# Altium PCB WorldClock.PcbDoc (part 3 of 13)
Units mil, origin at the board's own origin, x right, y up, seen from the top; angles counter-clockwise.
Board outline 3700 x 3850 mil, 2 copper layers (Top Layer, Bottom Layer); 227 components, 134 nets, 1324 pads, 248 vias.
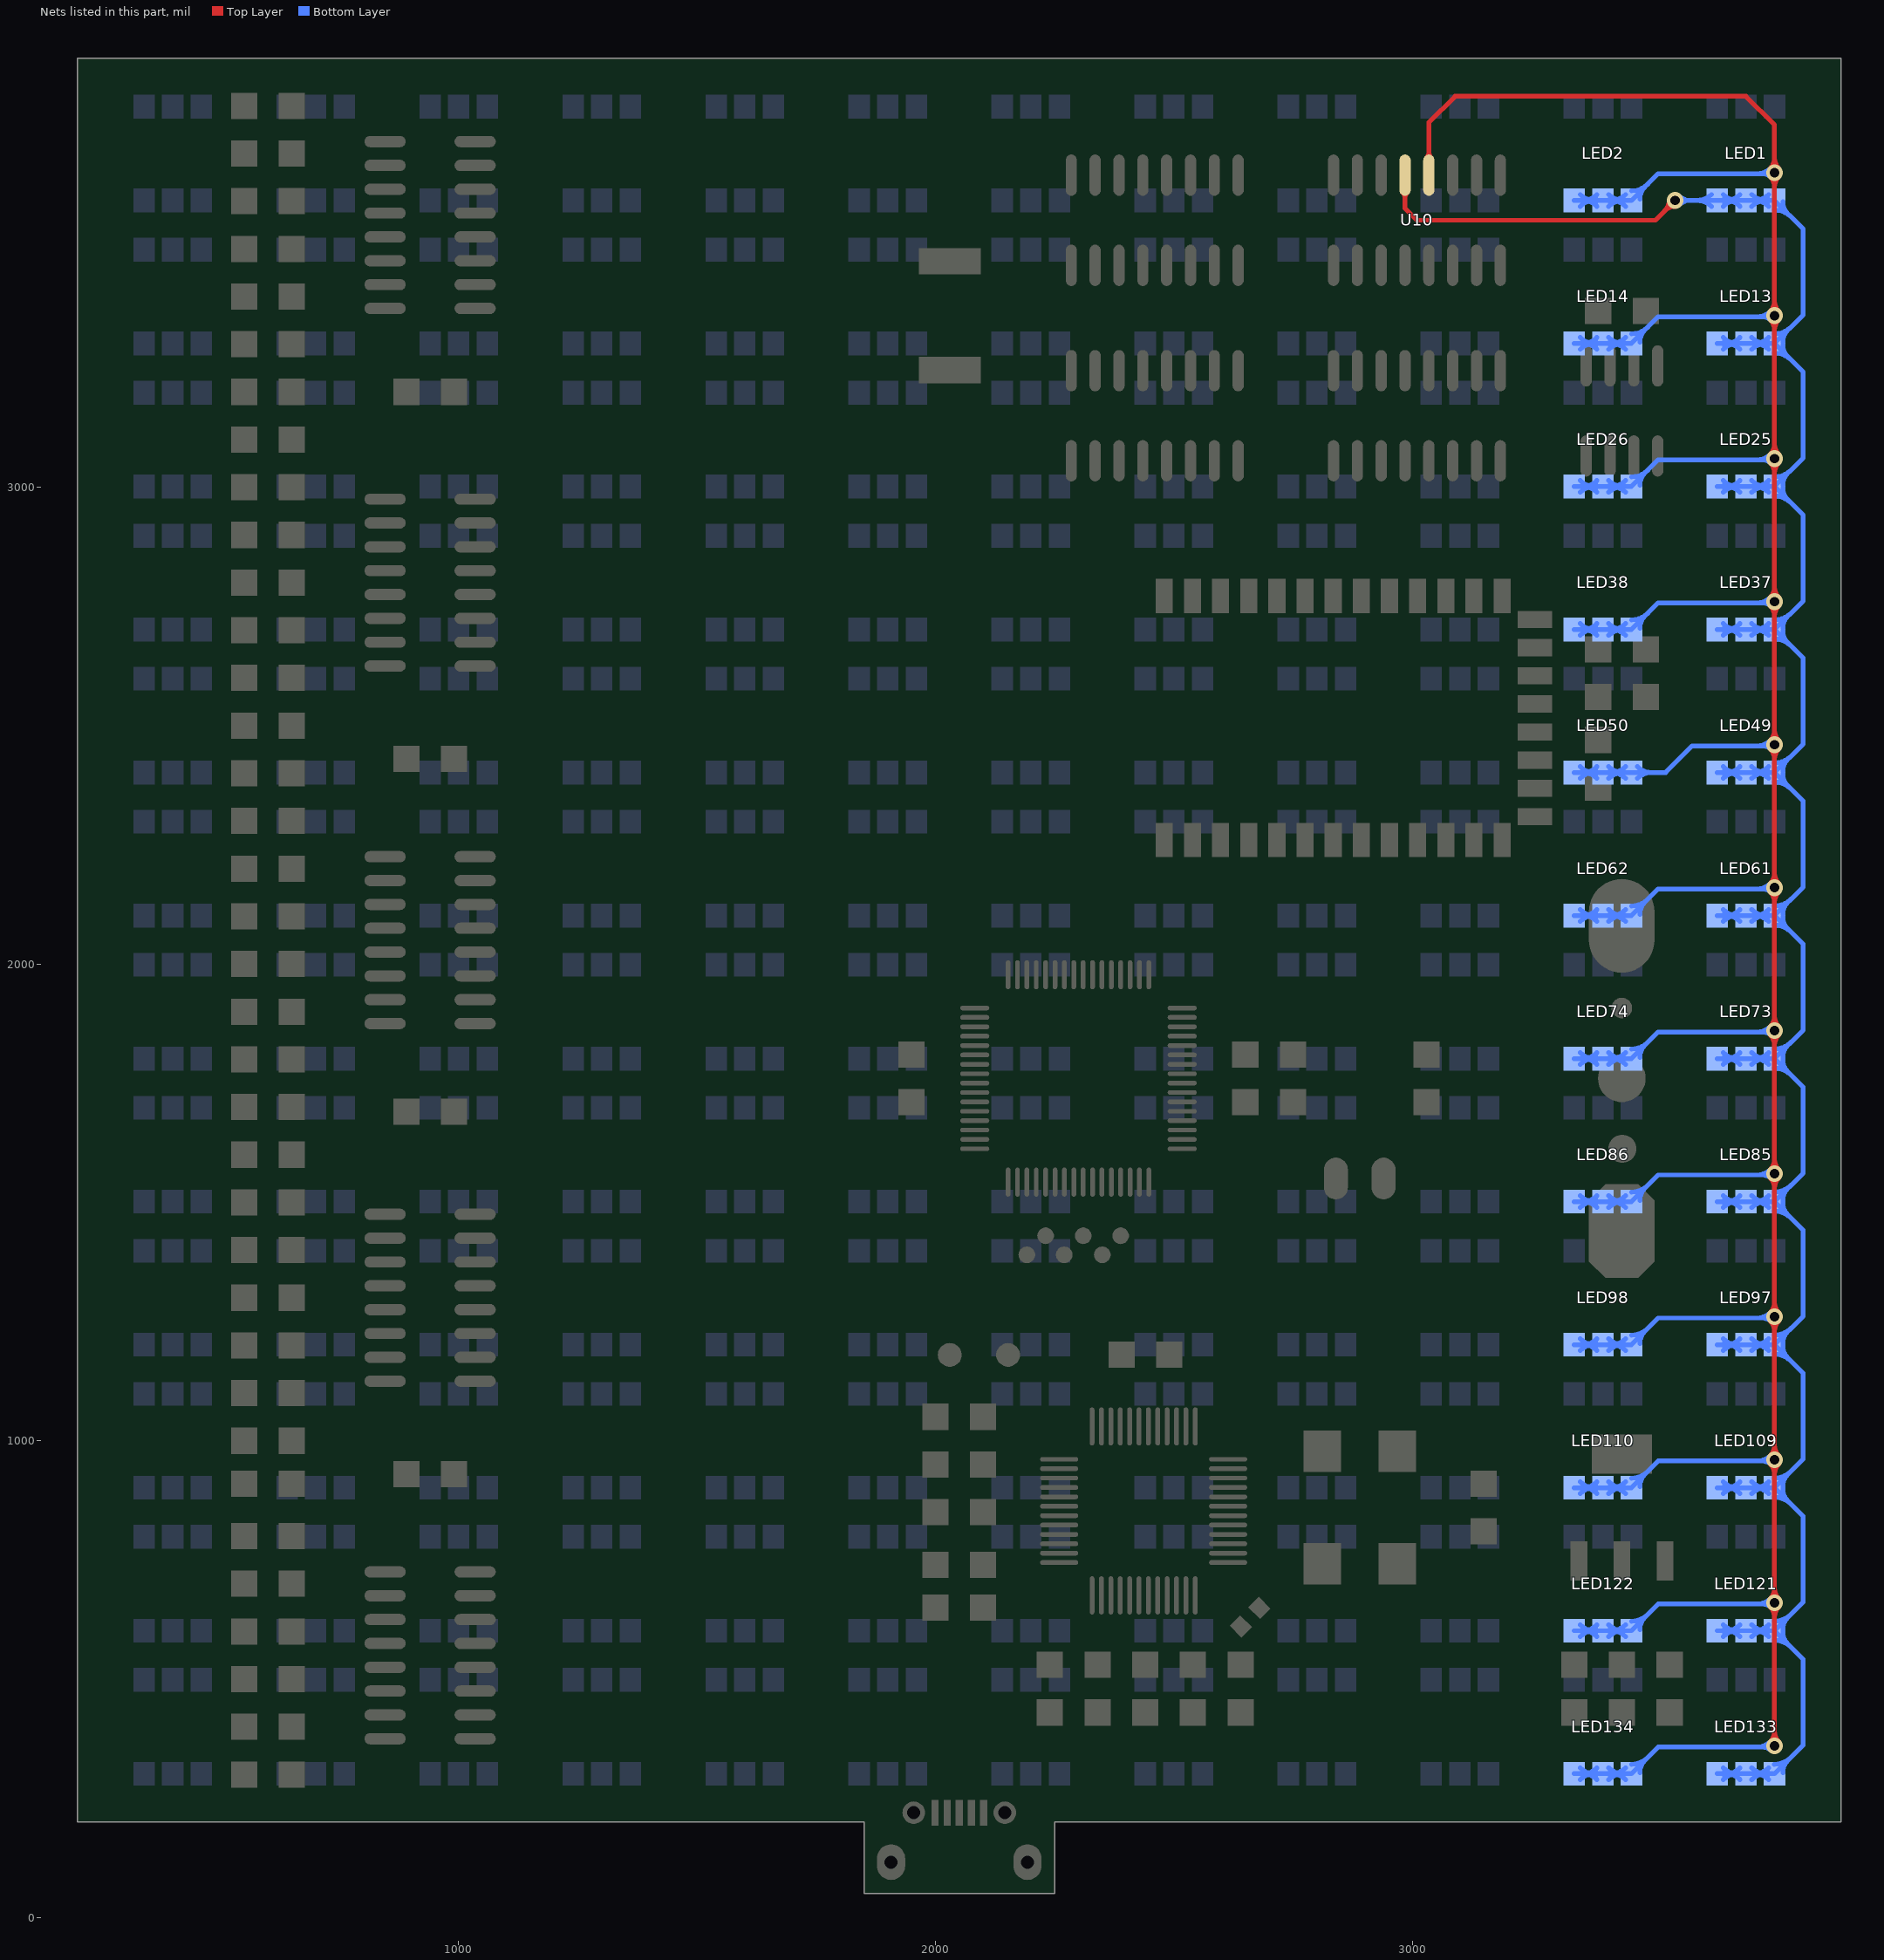
[diagram p3: the nets of this part, all layers, seen from the top]

## Via types
v1: diameter 35, hole 20, Top Layer to Bottom Layer, tented both sides, 213 vias
v2: diameter 24, hole 12, Top Layer to Bottom Layer, tented both sides, 35 vias

## Nets (pads, with @x,y where several pads share a name; then routed paths per layer and width w, separated by ;. In a path a pad name is that pad's centre, name@x,y a point inside that pad or via, vN(x,y) a via of type N, cw(c..) or ccw(c..) an arc to the next point about the centre after c; other vN are vias at no path point) (continued)
CH1: LED1.4 LED1.5 LED1.6 LED13.4 LED13.5 LED13.6 LED25.4 LED25.5 LED25.6 LED37.4 LED37.5 LED37.6 LED49.4 LED49.5 LED49.6 LED61.4 LED61.5 LED61.6 LED73.4 LED73.5 LED73.6 LED85.4 LED85.5 LED85.6 LED97.4 LED97.5 LED97.6 LED109.4 LED109.5 LED109.6 LED121.4 LED121.5 LED121.6 LED133.4 LED133.5 LED133.6 U10.13 | length 12195.9
  Top Layer w10: U10.13@2980.18,3618.18 cw(c2968.56,3606.55) 2985,3606.55 cw(c3001.44,3606.55) U10.13@2989.82,3618.18 ; U10.13@2985,3654.49 2985,3585 3010,3560 3510,3560 v1@3550,3600 ; v1@3539.07,3601.57 cw(c3508.9,3601.57) 3530.24,3580.24 cw(c3551.57,3558.9) v1@3551.57,3589.07
  Bottom Layer w10: v1@3550,3600 v1(3551.57,3601.57) LED1.6@3640,3601.57 LED1.5@3700,3601.57 LED1.4@3760,3601.57 3820,3541.57 3820,3361.57 LED13.4@3760,3301.57 ; v1@3560.41,3592.74 cw(c3581.75,3571.4) 3581.75,3601.57 cw(c3581.75,3631.75) v1@3560.41,3610.41 ; LED1.6@3627.63,3589.2 ccw(c3597.75,3559.33) 3597.75,3601.57 ccw(c3597.75,3643.82) LED1.6@3627.63,3613.95 ; LED133.6@3640,301.57 LED133.5@3700,301.57 LED133.4@3760,301.57 3820,361.57 3820,541.57 LED121.4@3760,601.57 ; LED121.6@3640,601.57 LED121.5@3700,601.57 LED121.4@3760,601.57 ; LED109.6@3640,901.57 LED109.5@3700,901.57 LED109.4@3760,901.57 ; LED97.6@3640,1201.57 LED97.5@3700,1201.57 LED97.4@3760,1201.57 ; LED85.6@3640,1501.57 LED85.5@3700,1501.57 LED85.4@3760,1501.57 ; LED73.6@3640,1801.57 LED73.5@3700,1801.57 LED73.4@3760,1801.57 ; LED61.6@3640,2101.57 LED61.5@3700,2101.57 LED61.4@3760,2101.57 ; LED49.6@3640,2401.57 LED49.5@3700,2401.57 LED49.4@3760,2401.57 ; LED37.6@3640,2701.57 LED37.5@3700,2701.57 LED37.4@3760,2701.57 ; LED25.6@3640,3001.57 LED25.5@3700,3001.57 LED25.4@3760,3001.57 ; LED13.6@3640,3301.57 LED13.5@3700,3301.57 LED13.4@3760,3301.57 ; LED133.6@3652.37,289.2 cw(c3682.25,259.33) 3682.25,301.57 cw(c3682.25,343.82) LED133.6@3652.37,313.95 ; LED121.6@3652.37,589.2 cw(c3682.25,559.33) 3682.25,601.57 cw(c3682.25,643.82) LED121.6@3652.37,613.95 ; LED109.6@3652.37,889.2 cw(c3682.25,859.33) 3682.25,901.57 cw(c3682.25,943.82) LED109.6@3652.37,913.95 ; LED97.6@3652.37,1189.2 cw(c3682.25,1159.33) 3682.25,1201.57 cw(c3682.25,1243.82) LED97.6@3652.37,1213.95 ; LED85.6@3652.37,1489.2 cw(c3682.25,1459.33) 3682.25,1501.57 cw(c3682.25,1543.82) LED85.6@3652.37,1513.95 ; LED73.6@3652.37,1789.2 cw(c3682.25,1759.33) 3682.25,1801.57 cw(c3682.25,1843.82) LED73.6@3652.37,1813.95 ; LED61.6@3652.37,2089.2 cw(c3682.25,2059.33) 3682.25,2101.57 cw(c3682.25,2143.82) LED61.6@3652.37,2113.95 ; LED49.6@3652.37,2389.2 cw(c3682.25,2359.33) 3682.25,2401.57 cw(c3682.25,2443.82) LED49.6@3652.37,2413.95 ; LED37.6@3652.37,2689.2 cw(c3682.25,2659.33) 3682.25,2701.57 cw(c3682.25,2743.82) LED37.6@3652.37,2713.95 ; LED25.6@3652.37,2989.2 cw(c3682.25,2959.33) 3682.25,3001.57 cw(c3682.25,3043.82) LED25.6@3652.37,3013.95 ; LED13.6@3652.37,3289.2 cw(c3682.25,3259.33) 3682.25,3301.57 cw(c3682.25,3343.82) LED13.6@3652.37,3313.95 ; LED1.6@3652.37,3589.2 cw(c3682.25,3559.33) 3682.25,3601.57 cw(c3682.25,3643.82) LED1.6@3652.37,3613.95 ; LED133.6@3655.16,295.32 cw(c3671.02,286.17) 3666.28,303.86 ; LED133.6@3655.16,307.82 ccw(c3671.02,316.98) 3666.28,299.29 ; LED121.6@3655.16,595.32 cw(c3671.02,586.17) 3666.28,603.86 ; LED121.6@3655.16,607.82 ccw(c3671.02,616.98) 3666.28,599.29 ; LED109.6@3655.16,895.32 cw(c3671.02,886.17) 3666.28,903.86 ; LED109.6@3655.16,907.82 ccw(c3671.02,916.98) 3666.28,899.29 ; LED97.6@3655.16,1195.32 cw(c3671.02,1186.17) 3666.28,1203.86 ; LED97.6@3655.16,1207.82 ccw(c3671.02,1216.98) 3666.28,1199.29 ; LED85.6@3655.16,1495.32 cw(c3671.02,1486.17) 3666.28,1503.86 ; LED85.6@3655.16,1507.82 ccw(c3671.02,1516.98) 3666.28,1499.29 ; LED73.6@3655.16,1795.32 cw(c3671.02,1786.17) 3666.28,1803.86 ; LED73.6@3655.16,1807.82 ccw(c3671.02,1816.98) 3666.28,1799.29 ; LED61.6@3655.16,2095.32 cw(c3671.02,2086.17) 3666.28,2103.86 ; LED61.6@3655.16,2107.82 ccw(c3671.02,2116.98) 3666.28,2099.29 ; LED49.6@3655.16,2395.32 cw(c3671.02,2386.17) 3666.28,2403.86 ; LED49.6@3655.16,2407.82 ccw(c3671.02,2416.98) 3666.28,2399.29 ; LED37.6@3655.16,2695.32 cw(c3671.02,2686.17) 3666.28,2703.86 ; LED37.6@3655.16,2707.82 ccw(c3671.02,2716.98) 3666.28,2699.29 ; LED25.6@3655.16,2995.32 cw(c3671.02,2986.17) 3666.28,3003.86 ; LED25.6@3655.16,3007.82 ccw(c3671.02,3016.98) 3666.28,2999.29 ; LED13.6@3655.16,3295.32 cw(c3671.02,3286.17) 3666.28,3303.86 ; LED13.6@3655.16,3307.82 ccw(c3671.02,3316.98) 3666.28,3299.29 ; LED1.6@3655.16,3595.32 cw(c3671.02,3586.17) 3666.28,3603.86 ; LED1.6@3655.16,3607.82 ccw(c3671.02,3616.98) 3666.28,3599.29 ; LED133.6@3656.56,293.41 cw(c3664.87,290.57) 3667.15,299.06 ; LED133.6@3656.56,309.74 ccw(c3664.87,312.58) 3667.15,304.09 ; LED121.6@3656.56,593.41 cw(c3664.87,590.57) 3667.15,599.06 ; LED121.6@3656.56,609.74 ccw(c3664.87,612.58) 3667.15,604.09 ; LED109.6@3656.56,893.41 cw(c3664.87,890.57) 3667.15,899.06 ; LED109.6@3656.56,909.74 ccw(c3664.87,912.58) 3667.15,904.09 ; LED97.6@3656.56,1193.41 cw(c3664.87,1190.57) 3667.15,1199.06 ; LED97.6@3656.56,1209.74 ccw(c3664.87,1212.58) 3667.15,1204.09 ; LED85.6@3656.56,1493.41 cw(c3664.87,1490.57) 3667.15,1499.06 ; LED85.6@3656.56,1509.74 ccw(c3664.87,1512.58) 3667.15,1504.09 ; LED73.6@3656.56,1793.41 cw(c3664.87,1790.57) 3667.15,1799.06 ; LED73.6@3656.56,1809.74 ccw(c3664.87,1812.58) 3667.15,1804.09 ; LED61.6@3656.56,2093.41 cw(c3664.87,2090.57) 3667.15,2099.06 ; LED61.6@3656.56,2109.74 ccw(c3664.87,2112.58) 3667.15,2104.09 ; LED49.6@3656.56,2393.41 cw(c3664.87,2390.57) 3667.15,2399.06 ; LED49.6@3656.56,2409.74 ccw(c3664.87,2412.58) 3667.15,2404.09 ; LED37.6@3656.56,2693.41 cw(c3664.87,2690.57) 3667.15,2699.06 ; LED37.6@3656.56,2709.74 ccw(c3664.87,2712.58) 3667.15,2704.09 ; LED25.6@3656.56,2993.41 cw(c3664.87,2990.57) 3667.15,2999.06 ; LED25.6@3656.56,3009.74 ccw(c3664.87,3012.58) 3667.15,3004.09 ; LED13.6@3656.56,3293.41 cw(c3664.87,3290.57) 3667.15,3299.06 ; LED13.6@3656.56,3309.74 ccw(c3664.87,3312.58) 3667.15,3304.09 ; LED1.6@3656.56,3593.41 cw(c3664.87,3590.57) 3667.15,3599.06 ; LED1.6@3656.56,3609.74 ccw(c3664.87,3612.58) 3667.15,3604.09 ; LED133.5@3687.63,289.2 ccw(c3657.75,259.33) 3657.75,301.57 ccw(c3657.75,343.82) LED133.5@3687.63,313.95 ; LED121.5@3687.63,589.2 ccw(c3657.75,559.33) 3657.75,601.57 ccw(c3657.75,643.82) LED121.5@3687.63,613.95 ; LED109.5@3687.63,889.2 ccw(c3657.75,859.33) 3657.75,901.57 ccw(c3657.75,943.82) LED109.5@3687.63,913.95 ; LED97.5@3687.63,1189.2 ccw(c3657.75,1159.33) 3657.75,1201.57 ccw(c3657.75,1243.82) LED97.5@3687.63,1213.95 ; LED85.5@3687.63,1489.2 ccw(c3657.75,1459.33) 3657.75,1501.57 ccw(c3657.75,1543.82) LED85.5@3687.63,1513.95 ; LED73.5@3687.63,1789.2 ccw(c3657.75,1759.33) 3657.75,1801.57 ccw(c3657.75,1843.82) LED73.5@3687.63,1813.95 ; LED61.5@3687.63,2089.2 ccw(c3657.75,2059.33) 3657.75,2101.57 ccw(c3657.75,2143.82) LED61.5@3687.63,2113.95 ; LED49.5@3687.63,2389.2 ccw(c3657.75,2359.33) 3657.75,2401.57 ccw(c3657.75,2443.82) LED49.5@3687.63,2413.95 ; LED37.5@3687.63,2689.2 ccw(c3657.75,2659.33) 3657.75,2701.57 ccw(c3657.75,2743.82) LED37.5@3687.63,2713.95 ; LED25.5@3687.63,2989.2 ccw(c3657.75,2959.33) 3657.75,3001.57 ccw(c3657.75,3043.82) LED25.5@3687.63,3013.95 ; LED13.5@3687.63,3289.2 ccw(c3657.75,3259.33) 3657.75,3301.57 ccw(c3657.75,3343.82) LED13.5@3687.63,3313.95 ; LED1.5@3687.63,3589.2 ccw(c3657.75,3559.33) 3657.75,3601.57 ccw(c3657.75,3643.82) LED1.5@3687.63,3613.95 ; LED133.5@3712.37,289.2 cw(c3742.25,259.33) 3742.25,301.57 cw(c3742.25,343.82) LED133.5@3712.37,313.95 ; LED121.5@3712.37,589.2 cw(c3742.25,559.33) 3742.25,601.57 cw(c3742.25,643.82) LED121.5@3712.37,613.95 ; LED109.5@3712.37,889.2 cw(c3742.25,859.33) 3742.25,901.57 cw(c3742.25,943.82) LED109.5@3712.37,913.95 ; LED97.5@3712.37,1189.2 cw(c3742.25,1159.33) 3742.25,1201.57 cw(c3742.25,1243.82) LED97.5@3712.37,1213.95 ; LED85.5@3712.37,1489.2 cw(c3742.25,1459.33) 3742.25,1501.57 cw(c3742.25,1543.82) LED85.5@3712.37,1513.95 ; LED73.5@3712.37,1789.2 cw(c3742.25,1759.33) 3742.25,1801.57 cw(c3742.25,1843.82) LED73.5@3712.37,1813.95 ; LED61.5@3712.37,2089.2 cw(c3742.25,2059.33) 3742.25,2101.57 cw(c3742.25,2143.82) LED61.5@3712.37,2113.95 ; LED49.5@3712.37,2389.2 cw(c3742.25,2359.33) 3742.25,2401.57 cw(c3742.25,2443.82) LED49.5@3712.37,2413.95 ; LED37.5@3712.37,2689.2 cw(c3742.25,2659.33) 3742.25,2701.57 cw(c3742.25,2743.82) LED37.5@3712.37,2713.95 ; LED25.5@3712.37,2989.2 cw(c3742.25,2959.33) 3742.25,3001.57 cw(c3742.25,3043.82) LED25.5@3712.37,3013.95 ; LED13.5@3712.37,3289.2 cw(c3742.25,3259.33) 3742.25,3301.57 cw(c3742.25,3343.82) LED13.5@3712.37,3313.95 ; LED1.5@3712.37,3589.2 cw(c3742.25,3559.33) 3742.25,3601.57 cw(c3742.25,3643.82) LED1.5@3712.37,3613.95 ; 3732.85,299.06 cw(c3735.13,290.57) LED133.4@3743.44,293.41 ; 3732.85,304.09 ccw(c3735.13,312.58) LED133.4@3743.44,309.74 ; 3732.85,599.06 cw(c3735.13,590.57) LED121.4@3743.44,593.41 ; 3732.85,604.09 ccw(c3735.13,612.58) LED121.4@3743.44,609.74 ; 3732.85,899.06 cw(c3735.13,890.57) LED109.4@3743.44,893.41 ; 3732.85,904.09 ccw(c3735.13,912.58) LED109.4@3743.44,909.74 ; 3732.85,1199.06 cw(c3735.13,1190.57) LED97.4@3743.44,1193.41 ; 3732.85,1204.09 ccw(c3735.13,1212.58) LED97.4@3743.44,1209.74 ; 3732.85,1499.06 cw(c3735.13,1490.57) LED85.4@3743.44,1493.41 ; 3732.85,1504.09 ccw(c3735.13,1512.58) LED85.4@3743.44,1509.74 ; 3732.85,1799.06 cw(c3735.13,1790.57) LED73.4@3743.44,1793.41 ; 3732.85,1804.09 ccw(c3735.13,1812.58) LED73.4@3743.44,1809.74 ; 3732.85,2099.06 cw(c3735.13,2090.57) LED61.4@3743.44,2093.41 ; 3732.85,2104.09 ccw(c3735.13,2112.58) LED61.4@3743.44,2109.74 ; 3732.85,2399.06 cw(c3735.13,2390.57) LED49.4@3743.44,2393.41 ; 3732.85,2404.09 ccw(c3735.13,2412.58) LED49.4@3743.44,2409.74 ; 3732.85,2699.06 cw(c3735.13,2690.57) LED37.4@3743.44,2693.41 ; 3732.85,2704.09 ccw(c3735.13,2712.58) LED37.4@3743.44,2709.74 ; 3732.85,2999.06 cw(c3735.13,2990.57) LED25.4@3743.44,2993.41 ; 3732.85,3004.09 ccw(c3735.13,3012.58) LED25.4@3743.44,3009.74 ; 3732.85,3299.06 cw(c3735.13,3290.57) LED13.4@3743.44,3293.41 ; 3732.85,3304.09 ccw(c3735.13,3312.58) LED13.4@3743.44,3309.74 ; 3732.85,3599.06 cw(c3735.13,3590.57) LED1.4@3743.44,3593.41 ; 3732.85,3604.09 ccw(c3735.13,3612.58) LED1.4@3743.44,3609.74 ; 3733.72,299.29 ccw(c3728.98,316.98) LED133.4@3744.84,307.82 ; 3733.72,303.86 cw(c3728.98,286.17) LED133.4@3744.84,295.32 ; 3733.72,599.29 ccw(c3728.98,616.98) LED121.4@3744.84,607.82 ; 3733.72,603.86 cw(c3728.98,586.17) LED121.4@3744.84,595.32 ; 3733.72,899.29 ccw(c3728.98,916.98) LED109.4@3744.84,907.82 ; 3733.72,903.86 cw(c3728.98,886.17) LED109.4@3744.84,895.32 ; 3733.72,1199.29 ccw(c3728.98,1216.98) LED97.4@3744.84,1207.82 ; 3733.72,1203.86 cw(c3728.98,1186.17) LED97.4@3744.84,1195.32 ; 3733.72,1499.29 ccw(c3728.98,1516.98) LED85.4@3744.84,1507.82 ; 3733.72,1503.86 cw(c3728.98,1486.17) LED85.4@3744.84,1495.32 ; 3733.72,1799.29 ccw(c3728.98,1816.98) LED73.4@3744.84,1807.82 ; 3733.72,1803.86 cw(c3728.98,1786.17) LED73.4@3744.84,1795.32 ; 3733.72,2099.29 ccw(c3728.98,2116.98) LED61.4@3744.84,2107.82 ; 3733.72,2103.86 cw(c3728.98,2086.17) LED61.4@3744.84,2095.32 ; 3733.72,2399.29 ccw(c3728.98,2416.98) LED49.4@3744.84,2407.82 ; 3733.72,2403.86 cw(c3728.98,2386.17) LED49.4@3744.84,2395.32 ; 3733.72,2699.29 ccw(c3728.98,2716.98) LED37.4@3744.84,2707.82 ; 3733.72,2703.86 cw(c3728.98,2686.17) LED37.4@3744.84,2695.32 ; 3733.72,2999.29 ccw(c3728.98,3016.98) LED25.4@3744.84,3007.82 ; 3733.72,3003.86 cw(c3728.98,2986.17) LED25.4@3744.84,2995.32 ; 3733.72,3299.29 ccw(c3728.98,3316.98) LED13.4@3744.84,3307.82 ; 3733.72,3303.86 cw(c3728.98,3286.17) LED13.4@3744.84,3295.32 ; 3733.72,3599.29 ccw(c3728.98,3616.98) LED1.4@3744.84,3607.82 ; 3733.72,3603.86 cw(c3728.98,3586.17) LED1.4@3744.84,3595.32 ; LED133.4@3747.63,289.2 ccw(c3717.75,259.33) 3717.75,301.57 ccw(c3717.75,343.82) LED133.4@3747.63,313.95 ; LED121.4@3747.63,589.2 ccw(c3717.75,559.33) 3717.75,601.57 ccw(c3717.75,643.82) LED121.4@3747.63,613.95 ; LED109.4@3747.63,889.2 ccw(c3717.75,859.33) 3717.75,901.57 ccw(c3717.75,943.82) LED109.4@3747.63,913.95 ; LED97.4@3747.63,1189.2 ccw(c3717.75,1159.33) 3717.75,1201.57 ccw(c3717.75,1243.82) LED97.4@3747.63,1213.95 ; LED85.4@3747.63,1489.2 ccw(c3717.75,1459.33) 3717.75,1501.57 ccw(c3717.75,1543.82) LED85.4@3747.63,1513.95 ; LED73.4@3747.63,1789.2 ccw(c3717.75,1759.33) 3717.75,1801.57 ccw(c3717.75,1843.82) LED73.4@3747.63,1813.95 ; LED61.4@3747.63,2089.2 ccw(c3717.75,2059.33) 3717.75,2101.57 ccw(c3717.75,2143.82) LED61.4@3747.63,2113.95 ; LED49.4@3747.63,2389.2 ccw(c3717.75,2359.33) 3717.75,2401.57 ccw(c3717.75,2443.82) LED49.4@3747.63,2413.95 ; LED37.4@3747.63,2689.2 ccw(c3717.75,2659.33) 3717.75,2701.57 ccw(c3717.75,2743.82) LED37.4@3747.63,2713.95 ; LED25.4@3747.63,2989.2 ccw(c3717.75,2959.33) 3717.75,3001.57 ccw(c3717.75,3043.82) LED25.4@3747.63,3013.95 ; LED13.4@3747.63,3289.2 ccw(c3717.75,3259.33) 3717.75,3301.57 ccw(c3717.75,3343.82) LED13.4@3747.63,3313.95 ; LED1.4@3747.63,3589.2 ccw(c3717.75,3559.33) 3717.75,3601.57 ccw(c3717.75,3643.82) LED1.4@3747.63,3613.95 ; LED133.4@3760,321.57 ccw(c3760,369.86) 3794.14,335.72 ; LED121.4@3760,581.57 cw(c3760,533.29) 3794.14,567.43 ; LED121.4@3760,621.57 ccw(c3760,669.86) 3794.14,635.72 ; LED109.4@3760,881.57 cw(c3760,833.29) 3794.14,867.43 ; LED109.4@3760,921.57 ccw(c3760,969.86) 3794.14,935.72 ; LED97.4@3760,1181.57 cw(c3760,1133.29) 3794.14,1167.43 ; LED97.4@3760,1221.57 ccw(c3760,1269.86) 3794.14,1235.72 ; LED85.4@3760,1481.57 cw(c3760,1433.29) 3794.14,1467.43 ; LED85.4@3760,1521.57 ccw(c3760,1569.86) 3794.14,1535.72 ; LED73.4@3760,1781.57 cw(c3760,1733.29) 3794.14,1767.43 ; LED73.4@3760,1821.57 ccw(c3760,1869.86) 3794.14,1835.72 ; LED61.4@3760,2081.57 cw(c3760,2033.29) 3794.14,2067.43 ; LED61.4@3760,2121.57 ccw(c3760,2169.86) 3794.14,2135.72 ; LED49.4@3760,2381.57 cw(c3760,2333.29) 3794.14,2367.43 ; LED49.4@3760,2421.57 ccw(c3760,2469.86) 3794.14,2435.72 ; LED37.4@3760,2681.57 cw(c3760,2633.29) 3794.14,2667.43 ; LED37.4@3760,2721.57 ccw(c3760,2769.86) 3794.14,2735.72 ; LED25.4@3760,2981.57 cw(c3760,2933.29) 3794.14,2967.43 ; LED25.4@3760,3021.57 ccw(c3760,3069.86) 3794.14,3035.72 ; LED13.4@3760,3281.57 cw(c3760,3233.29) 3794.14,3267.43 ; LED13.4@3760,3321.57 ccw(c3760,3369.86) 3794.14,3335.72 ; LED1.4@3760,3581.57 cw(c3760,3533.29) 3794.14,3567.43 ; LED133.4@3777.5,304.07 cw(c3813.71,304.07) 3788.11,329.68 ; LED121.4@3777.5,599.07 ccw(c3813.71,599.07) 3788.11,573.47 ; LED121.4@3777.5,604.07 cw(c3813.71,604.07) 3788.11,629.68 ; LED109.4@3777.5,899.07 ccw(c3813.71,899.07) 3788.11,873.47 ; LED109.4@3777.5,904.07 cw(c3813.71,904.07) 3788.11,929.68 ; LED97.4@3777.5,1199.07 ccw(c3813.71,1199.07) 3788.11,1173.47 ; LED97.4@3777.5,1204.07 cw(c3813.71,1204.07) 3788.11,1229.68 ; LED85.4@3777.5,1499.07 ccw(c3813.71,1499.07) 3788.11,1473.47 ; LED85.4@3777.5,1504.07 cw(c3813.71,1504.07) 3788.11,1529.68 ; LED73.4@3777.5,1799.07 ccw(c3813.71,1799.07) 3788.11,1773.47 ; LED73.4@3777.5,1804.07 cw(c3813.71,1804.07) 3788.11,1829.68 ; LED61.4@3777.5,2099.07 ccw(c3813.71,2099.07) 3788.11,2073.47 ; LED61.4@3777.5,2104.07 cw(c3813.71,2104.07) 3788.11,2129.68 ; LED49.4@3777.5,2399.07 ccw(c3813.71,2399.07) 3788.11,2373.47 ; LED49.4@3777.5,2404.07 cw(c3813.71,2404.07) 3788.11,2429.68 ; LED37.4@3777.5,2699.07 ccw(c3813.71,2699.07) 3788.11,2673.47 ; LED37.4@3777.5,2704.07 cw(c3813.71,2704.07) 3788.11,2729.68 ; LED25.4@3777.5,2999.07 ccw(c3813.71,2999.07) 3788.11,2973.47 ; LED25.4@3777.5,3004.07 cw(c3813.71,3004.07) 3788.11,3029.68 ; LED13.4@3777.5,3299.07 ccw(c3813.71,3299.07) 3788.11,3273.47 ; LED13.4@3777.5,3304.07 cw(c3813.71,3304.07) 3788.11,3329.68 ; LED1.4@3777.5,3599.07 ccw(c3813.71,3599.07) 3788.11,3573.47 ; LED121.4@3760,601.57 3820,661.57 3820,841.57 LED109.4@3760,901.57 ; LED109.4@3760,901.57 3820,961.57 3820,1141.57 LED97.4@3760,1201.57 ; LED97.4@3760,1201.57 3820,1261.57 3820,1441.57 LED85.4@3760,1501.57 ; LED85.4@3760,1501.57 3820,1561.57 3820,1741.57 LED73.4@3760,1801.57 ; LED73.4@3760,1801.57 3820,1861.57 3820,2041.57 LED61.4@3760,2101.57 ; LED61.4@3760,2101.57 3820,2161.57 3820,2341.57 LED49.4@3760,2401.57 ; LED49.4@3760,2401.57 3820,2461.57 3820,2641.57 LED37.4@3760,2701.57 ; LED37.4@3760,2701.57 3820,2761.57 3820,2941.57 LED25.4@3760,3001.57 ; LED25.4@3760,3001.57 3820,3061.57 3820,3241.57 LED13.4@3760,3301.57
CH2: LED2.4 LED2.5 LED2.6 LED14.4 LED14.5 LED14.6 LED26.4 LED26.5 LED26.6 LED38.4 LED38.5 LED38.6 LED50.4 LED50.5 LED50.6 LED62.4 LED62.5 LED62.6 LED74.4 LED74.5 LED74.6 LED86.4 LED86.5 LED86.6 LED98.4 LED98.5 LED98.6 LED110.4 LED110.5 LED110.6 LED122.4 LED122.5 LED122.6 LED134.4 LED134.5 LED134.6 U10.12 | length 16604.9
  Top Layer w10: U10.12@3030.18,3690.8 ccw(c3018.56,3702.43) 3035,3702.43 ccw(c3051.44,3702.43) U10.12@3039.82,3690.8 ; U10.12@3035,3654.49 3035,3765 3090,3820 3700,3820 3760,3760 v1(3760,3660) v1(3760,3360) v1(3760,3060) v1(3760,2760) v1(3760,2460) v1(3760,2160) v1(3760,1860) v1(3760,1560) v1(3760,1260) v1(3760,960) v1(3760,660) v1(3760,360) ; v1@3751.16,368.84 ccw(c3729.82,390.18) 3760,390.18 ccw(c3790.18,390.18) v1@3768.84,368.84 ; v1@3751.16,651.16 cw(c3729.82,629.82) 3760,629.82 cw(c3790.18,629.82) v1@3768.84,651.16 ; v1@3751.16,668.84 ccw(c3729.82,690.18) 3760,690.18 ccw(c3790.18,690.18) v1@3768.84,668.84 ; v1@3751.16,951.16 cw(c3729.82,929.82) 3760,929.82 cw(c3790.18,929.82) v1@3768.84,951.16 ; v1@3751.16,968.84 ccw(c3729.82,990.18) 3760,990.18 ccw(c3790.18,990.18) v1@3768.84,968.84 ; v1@3751.16,1251.16 cw(c3729.82,1229.82) 3760,1229.82 cw(c3790.18,1229.82) v1@3768.84,1251.16 ; v1@3751.16,1268.84 ccw(c3729.82,1290.18) 3760,1290.18 ccw(c3790.18,1290.18) v1@3768.84,1268.84 ; v1@3751.16,1551.16 cw(c3729.82,1529.82) 3760,1529.82 cw(c3790.18,1529.82) v1@3768.84,1551.16 ; v1@3751.16,1568.84 ccw(c3729.82,1590.18) 3760,1590.18 ccw(c3790.18,1590.18) v1@3768.84,1568.84 ; v1@3751.16,1851.16 cw(c3729.82,1829.82) 3760,1829.82 cw(c3790.18,1829.82) v1@3768.84,1851.16 ; v1@3751.16,1868.84 ccw(c3729.82,1890.18) 3760,1890.18 ccw(c3790.18,1890.18) v1@3768.84,1868.84 ; v1@3751.16,2151.16 cw(c3729.82,2129.82) 3760,2129.82 cw(c3790.18,2129.82) v1@3768.84,2151.16 ; v1@3751.16,2168.84 ccw(c3729.82,2190.18) 3760,2190.18 ccw(c3790.18,2190.18) v1@3768.84,2168.84 ; v1@3751.16,2451.16 cw(c3729.82,2429.82) 3760,2429.82 cw(c3790.18,2429.82) v1@3768.84,2451.16 ; v1@3751.16,2468.84 ccw(c3729.82,2490.18) 3760,2490.18 ccw(c3790.18,2490.18) v1@3768.84,2468.84 ; v1@3751.16,2751.16 cw(c3729.82,2729.82) 3760,2729.82 cw(c3790.18,2729.82) v1@3768.84,2751.16 ; v1@3751.16,2768.84 ccw(c3729.82,2790.18) 3760,2790.18 ccw(c3790.18,2790.18) v1@3768.84,2768.84 ; v1@3751.16,3051.16 cw(c3729.82,3029.82) 3760,3029.82 cw(c3790.18,3029.82) v1@3768.84,3051.16 ; v1@3751.16,3068.84 ccw(c3729.82,3090.18) 3760,3090.18 ccw(c3790.18,3090.18) v1@3768.84,3068.84 ; v1@3751.16,3351.16 cw(c3729.82,3329.82) 3760,3329.82 cw(c3790.18,3329.82) v1@3768.84,3351.16 ; v1@3751.16,3368.84 ccw(c3729.82,3390.18) 3760,3390.18 ccw(c3790.18,3390.18) v1@3768.84,3368.84 ; v1@3751.16,3651.16 cw(c3729.82,3629.82) 3760,3629.82 cw(c3790.18,3629.82) v1@3768.84,3651.16 ; v1@3751.16,3668.84 ccw(c3729.82,3690.18) 3760,3690.18 ccw(c3790.18,3690.18) v1@3768.84,3668.84
  Bottom Layer w10: LED134.6@3340,301.57 LED134.5@3400,301.57 LED134.4@3460,301.57 3515.93,357.5 3757.5,357.5 v1(3760,360) ; LED122.6@3340,601.57 LED122.5@3400,601.57 LED122.4@3460,601.57 3515.93,657.5 3757.5,657.5 v1(3760,660) ; LED110.6@3340,901.57 LED110.5@3400,901.57 LED110.4@3460,901.57 3515.93,957.5 3757.5,957.5 v1(3760,960) ; LED98.6@3340,1201.57 LED98.5@3400,1201.57 LED98.4@3460,1201.57 3515.93,1257.5 3757.5,1257.5 v1(3760,1260) ; LED86.6@3340,1501.57 LED86.5@3400,1501.57 LED86.4@3460,1501.57 3515.93,1557.5 3757.5,1557.5 v1(3760,1560) ; LED74.6@3340,1801.57 LED74.5@3400,1801.57 LED74.4@3460,1801.57 3515.93,1857.5 3757.5,1857.5 v1(3760,1860) ; LED62.6@3340,2101.57 LED62.5@3400,2101.57 LED62.4@3460,2101.57 3515.93,2157.5 3757.5,2157.5 v1(3760,2160) ; LED50.6@3340,2401.57 LED50.5@3400,2401.57 LED50.4@3460,2401.57 3531.57,2401.57 3587.5,2457.5 3757.5,2457.5 v1(3760,2460) ; LED38.6@3340,2701.57 LED38.5@3400,2701.57 LED38.4@3460,2701.57 3515.93,2757.5 3757.5,2757.5 v1(3760,2760) ; LED26.6@3340,3001.57 LED26.5@3400,3001.57 LED26.4@3460,3001.57 3515.93,3057.5 3757.5,3057.5 v1(3760,3060) ; LED14.6@3340,3301.57 LED14.5@3400,3301.57 LED14.4@3460,3301.57 3515.93,3357.5 3757.5,3357.5 v1(3760,3360) ; LED2.6@3340,3601.57 LED2.5@3400,3601.57 LED2.4@3460,3601.57 3515.93,3657.5 3757.5,3657.5 v1(3760,3660) ; LED134.6@3352.37,289.2 cw(c3382.25,259.33) 3382.25,301.57 cw(c3382.25,343.82) LED134.6@3352.37,313.95 ; LED122.6@3352.37,589.2 cw(c3382.25,559.33) 3382.25,601.57 cw(c3382.25,643.82) LED122.6@3352.37,613.95 ; LED110.6@3352.37,889.2 cw(c3382.25,859.33) 3382.25,901.57 cw(c3382.25,943.82) LED110.6@3352.37,913.95 ; LED98.6@3352.37,1189.2 cw(c3382.25,1159.33) 3382.25,1201.57 cw(c3382.25,1243.82) LED98.6@3352.37,1213.95 ; LED86.6@3352.37,1489.2 cw(c3382.25,1459.33) 3382.25,1501.57 cw(c3382.25,1543.82) LED86.6@3352.37,1513.95 ; LED74.6@3352.37,1789.2 cw(c3382.25,1759.33) 3382.25,1801.57 cw(c3382.25,1843.82) LED74.6@3352.37,1813.95 ; LED62.6@3352.37,2089.2 cw(c3382.25,2059.33) 3382.25,2101.57 cw(c3382.25,2143.82) LED62.6@3352.37,2113.95 ; LED50.6@3352.37,2389.2 cw(c3382.25,2359.33) 3382.25,2401.57 cw(c3382.25,2443.82) LED50.6@3352.37,2413.95 ; LED38.6@3352.37,2689.2 cw(c3382.25,2659.33) 3382.25,2701.57 cw(c3382.25,2743.82) LED38.6@3352.37,2713.95 ; LED26.6@3352.37,2989.2 cw(c3382.25,2959.33) 3382.25,3001.57 cw(c3382.25,3043.82) LED26.6@3352.37,3013.95 ; LED14.6@3352.37,3289.2 cw(c3382.25,3259.33) 3382.25,3301.57 cw(c3382.25,3343.82) LED14.6@3352.37,3313.95 ; LED2.6@3352.37,3589.2 cw(c3382.25,3559.33) 3382.25,3601.57 cw(c3382.25,3643.82) LED2.6@3352.37,3613.95 ; 3372.85,299.06 cw(c3375.13,290.57) LED134.5@3383.44,293.41 ; 3372.85,304.09 ccw(c3375.13,312.58) LED134.5@3383.44,309.74 ; 3372.85,599.06 cw(c3375.13,590.57) LED122.5@3383.44,593.41 ; 3372.85,604.09 ccw(c3375.13,612.58) LED122.5@3383.44,609.74 ; 3372.85,899.06 cw(c3375.13,890.57) LED110.5@3383.44,893.41 ; 3372.85,904.09 ccw(c3375.13,912.58) LED110.5@3383.44,909.74 ; 3372.85,1199.06 cw(c3375.13,1190.57) LED98.5@3383.44,1193.41 ; 3372.85,1204.09 ccw(c3375.13,1212.58) LED98.5@3383.44,1209.74 ; 3372.85,1499.06 cw(c3375.13,1490.57) LED86.5@3383.44,1493.41 ; 3372.85,1504.09 ccw(c3375.13,1512.58) LED86.5@3383.44,1509.74 ; 3372.85,1799.06 cw(c3375.13,1790.57) LED74.5@3383.44,1793.41 ; 3372.85,1804.09 ccw(c3375.13,1812.58) LED74.5@3383.44,1809.74 ; 3372.85,2099.06 cw(c3375.13,2090.57) LED62.5@3383.44,2093.41 ; 3372.85,2104.09 ccw(c3375.13,2112.58) LED62.5@3383.44,2109.74 ; 3372.85,2399.06 cw(c3375.13,2390.57) LED50.5@3383.44,2393.41 ; 3372.85,2404.09 ccw(c3375.13,2412.58) LED50.5@3383.44,2409.74 ; 3372.85,2699.06 cw(c3375.13,2690.57) LED38.5@3383.44,2693.41 ; 3372.85,2704.09 ccw(c3375.13,2712.58) LED38.5@3383.44,2709.74 ; 3372.85,2999.06 cw(c3375.13,2990.57) LED26.5@3383.44,2993.41 ; 3372.85,3004.09 ccw(c3375.13,3012.58) LED26.5@3383.44,3009.74 ; 3372.85,3299.06 cw(c3375.13,3290.57) LED14.5@3383.44,3293.41 ; 3372.85,3304.09 ccw(c3375.13,3312.58) LED14.5@3383.44,3309.74 ; 3372.85,3599.06 cw(c3375.13,3590.57) LED2.5@3383.44,3593.41 ; 3372.85,3604.09 ccw(c3375.13,3612.58) LED2.5@3383.44,3609.74 ; 3373.72,299.29 ccw(c3368.98,316.98) LED134.5@3384.84,307.82 ; 3373.72,303.86 cw(c3368.98,286.17) LED134.5@3384.84,295.32 ; 3373.72,599.29 ccw(c3368.98,616.98) LED122.5@3384.84,607.82 ; 3373.72,603.86 cw(c3368.98,586.17) LED122.5@3384.84,595.32 ; 3373.72,899.29 ccw(c3368.98,916.98) LED110.5@3384.84,907.82 ; 3373.72,903.86 cw(c3368.98,886.17) LED110.5@3384.84,895.32 ; 3373.72,1199.29 ccw(c3368.98,1216.98) LED98.5@3384.84,1207.82 ; 3373.72,1203.86 cw(c3368.98,1186.17) LED98.5@3384.84,1195.32 ; 3373.72,1499.29 ccw(c3368.98,1516.98) LED86.5@3384.84,1507.82 ; 3373.72,1503.86 cw(c3368.98,1486.17) LED86.5@3384.84,1495.32 ; 3373.72,1799.29 ccw(c3368.98,1816.98) LED74.5@3384.84,1807.82 ; 3373.72,1803.86 cw(c3368.98,1786.17) LED74.5@3384.84,1795.32 ; 3373.72,2099.29 ccw(c3368.98,2116.98) LED62.5@3384.84,2107.82 ; 3373.72,2103.86 cw(c3368.98,2086.17) LED62.5@3384.84,2095.32 ; 3373.72,2399.29 ccw(c3368.98,2416.98) LED50.5@3384.84,2407.82 ; 3373.72,2403.86 cw(c3368.98,2386.17) LED50.5@3384.84,2395.32 ; 3373.72,2699.29 ccw(c3368.98,2716.98) LED38.5@3384.84,2707.82 ; 3373.72,2703.86 cw(c3368.98,2686.17) LED38.5@3384.84,2695.32 ; 3373.72,2999.29 ccw(c3368.98,3016.98) LED26.5@3384.84,3007.82 ; 3373.72,3003.86 cw(c3368.98,2986.17) LED26.5@3384.84,2995.32 ; 3373.72,3299.29 ccw(c3368.98,3316.98) LED14.5@3384.84,3307.82 ; 3373.72,3303.86 cw(c3368.98,3286.17) LED14.5@3384.84,3295.32 ; 3373.72,3599.29 ccw(c3368.98,3616.98) LED2.5@3384.84,3607.82 ; 3373.72,3603.86 cw(c3368.98,3586.17) LED2.5@3384.84,3595.32 ; LED134.5@3387.63,289.2 ccw(c3357.75,259.33) 3357.75,301.57 ccw(c3357.75,343.82) LED134.5@3387.63,313.95 ; LED122.5@3387.63,589.2 ccw(c3357.75,559.33) 3357.75,601.57 ccw(c3357.75,643.82) LED122.5@3387.63,613.95 ; LED110.5@3387.63,889.2 ccw(c3357.75,859.33) 3357.75,901.57 ccw(c3357.75,943.82) LED110.5@3387.63,913.95 ; LED98.5@3387.63,1189.2 ccw(c3357.75,1159.33) 3357.75,1201.57 ccw(c3357.75,1243.82) LED98.5@3387.63,1213.95 ; LED86.5@3387.63,1489.2 ccw(c3357.75,1459.33) 3357.75,1501.57 ccw(c3357.75,1543.82) LED86.5@3387.63,1513.95 ; LED74.5@3387.63,1789.2 ccw(c3357.75,1759.33) 3357.75,1801.57 ccw(c3357.75,1843.82) LED74.5@3387.63,1813.95 ; LED62.5@3387.63,2089.2 ccw(c3357.75,2059.33) 3357.75,2101.57 ccw(c3357.75,2143.82) LED62.5@3387.63,2113.95 ; LED50.5@3387.63,2389.2 ccw(c3357.75,2359.33) 3357.75,2401.57 ccw(c3357.75,2443.82) LED50.5@3387.63,2413.95 ; LED38.5@3387.63,2689.2 ccw(c3357.75,2659.33) 3357.75,2701.57 ccw(c3357.75,2743.82) LED38.5@3387.63,2713.95 ; LED26.5@3387.63,2989.2 ccw(c3357.75,2959.33) 3357.75,3001.57 ccw(c3357.75,3043.82) LED26.5@3387.63,3013.95 ; LED14.5@3387.63,3289.2 ccw(c3357.75,3259.33) 3357.75,3301.57 ccw(c3357.75,3343.82) LED14.5@3387.63,3313.95 ; LED2.5@3387.63,3589.2 ccw(c3357.75,3559.33) 3357.75,3601.57 ccw(c3357.75,3643.82) LED2.5@3387.63,3613.95 ; LED134.5@3412.37,289.2 cw(c3442.25,259.33) 3442.25,301.57 cw(c3442.25,343.82) LED134.5@3412.37,313.95 ; LED122.5@3412.37,589.2 cw(c3442.25,559.33) 3442.25,601.57 cw(c3442.25,643.82) LED122.5@3412.37,613.95 ; LED110.5@3412.37,889.2 cw(c3442.25,859.33) 3442.25,901.57 cw(c3442.25,943.82) LED110.5@3412.37,913.95 ; LED98.5@3412.37,1189.2 cw(c3442.25,1159.33) 3442.25,1201.57 cw(c3442.25,1243.82) LED98.5@3412.37,1213.95 ; LED86.5@3412.37,1489.2 cw(c3442.25,1459.33) 3442.25,1501.57 cw(c3442.25,1543.82) LED86.5@3412.37,1513.95 ; LED74.5@3412.37,1789.2 cw(c3442.25,1759.33) 3442.25,1801.57 cw(c3442.25,1843.82) LED74.5@3412.37,1813.95 ; LED62.5@3412.37,2089.2 cw(c3442.25,2059.33) 3442.25,2101.57 cw(c3442.25,2143.82) LED62.5@3412.37,2113.95 ; LED50.5@3412.37,2389.2 cw(c3442.25,2359.33) 3442.25,2401.57 cw(c3442.25,2443.82) LED50.5@3412.37,2413.95 ; LED38.5@3412.37,2689.2 cw(c3442.25,2659.33) 3442.25,2701.57 cw(c3442.25,2743.82) LED38.5@3412.37,2713.95 ; LED26.5@3412.37,2989.2 cw(c3442.25,2959.33) 3442.25,3001.57 cw(c3442.25,3043.82) LED26.5@3412.37,3013.95 ; LED14.5@3412.37,3289.2 cw(c3442.25,3259.33) 3442.25,3301.57 cw(c3442.25,3343.82) LED14.5@3412.37,3313.95 ; LED2.5@3412.37,3589.2 cw(c3442.25,3559.33) 3442.25,3601.57 cw(c3442.25,3643.82) LED2.5@3412.37,3613.95 ; LED134.5@3415.16,295.32 cw(c3431.02,286.17) 3426.28,303.86 ; LED134.5@3415.16,307.82 ccw(c3431.02,316.98) 3426.28,299.29 ; LED122.5@3415.16,595.32 cw(c3431.02,586.17) 3426.28,603.86 ; LED122.5@3415.16,607.82 ccw(c3431.02,616.98) 3426.28,599.29 ; LED110.5@3415.16,895.32 cw(c3431.02,886.17) 3426.28,903.86 ; LED110.5@3415.16,907.82 ccw(c3431.02,916.98) 3426.28,899.29 ; LED98.5@3415.16,1195.32 cw(c3431.02,1186.17) 3426.28,1203.86 ; LED98.5@3415.16,1207.82 ccw(c3431.02,1216.98) 3426.28,1199.29 ; LED86.5@3415.16,1495.32 cw(c3431.02,1486.17) 3426.28,1503.86 ; LED86.5@3415.16,1507.82 ccw(c3431.02,1516.98) 3426.28,1499.29 ; LED74.5@3415.16,1795.32 cw(c3431.02,1786.17) 3426.28,1803.86 ; LED74.5@3415.16,1807.82 ccw(c3431.02,1816.98) 3426.28,1799.29 ; LED62.5@3415.16,2095.32 cw(c3431.02,2086.17) 3426.28,2103.86 ; LED62.5@3415.16,2107.82 ccw(c3431.02,2116.98) 3426.28,2099.29 ; LED50.5@3415.16,2395.32 cw(c3431.02,2386.17) 3426.28,2403.86 ; LED50.5@3415.16,2407.82 ccw(c3431.02,2416.98) 3426.28,2399.29 ; LED38.5@3415.16,2695.32 cw(c3431.02,2686.17) 3426.28,2703.86 ; LED38.5@3415.16,2707.82 ccw(c3431.02,2716.98) 3426.28,2699.29 ; LED26.5@3415.16,2995.32 cw(c3431.02,2986.17) 3426.28,3003.86 ; LED26.5@3415.16,3007.82 ccw(c3431.02,3016.98) 3426.28,2999.29 ; LED14.5@3415.16,3295.32 cw(c3431.02,3286.17) 3426.28,3303.86 ; LED14.5@3415.16,3307.82 ccw(c3431.02,3316.98) 3426.28,3299.29 ; LED2.5@3415.16,3595.32 cw(c3431.02,3586.17) 3426.28,3603.86 ; LED2.5@3415.16,3607.82 ccw(c3431.02,3616.98) 3426.28,3599.29 ; LED134.5@3416.56,293.41 cw(c3424.87,290.57) 3427.15,299.06 ; LED134.5@3416.56,309.74 ccw(c3424.87,312.58) 3427.15,304.09 ; LED122.5@3416.56,593.41 cw(c3424.87,590.57) 3427.15,599.06 ; LED122.5@3416.56,609.74 ccw(c3424.87,612.58) 3427.15,604.09 ; LED110.5@3416.56,893.41 cw(c3424.87,890.57) 3427.15,899.06 ; LED110.5@3416.56,909.74 ccw(c3424.87,912.58) 3427.15,904.09 ; LED98.5@3416.56,1193.41 cw(c3424.87,1190.57) 3427.15,1199.06 ; LED98.5@3416.56,1209.74 ccw(c3424.87,1212.58) 3427.15,1204.09 ; LED86.5@3416.56,1493.41 cw(c3424.87,1490.57) 3427.15,1499.06 ; LED86.5@3416.56,1509.74 ccw(c3424.87,1512.58) 3427.15,1504.09 ; LED74.5@3416.56,1793.41 cw(c3424.87,1790.57) 3427.15,1799.06 ; LED74.5@3416.56,1809.74 ccw(c3424.87,1812.58) 3427.15,1804.09 ; LED62.5@3416.56,2093.41 cw(c3424.87,2090.57) 3427.15,2099.06 ; LED62.5@3416.56,2109.74 ccw(c3424.87,2112.58) 3427.15,2104.09 ; LED50.5@3416.56,2393.41 cw(c3424.87,2390.57) 3427.15,2399.06 ; LED50.5@3416.56,2409.74 ccw(c3424.87,2412.58) 3427.15,2404.09 ; LED38.5@3416.56,2693.41 cw(c3424.87,2690.57) 3427.15,2699.06 ; LED38.5@3416.56,2709.74 ccw(c3424.87,2712.58) 3427.15,2704.09 ; LED26.5@3416.56,2993.41 cw(c3424.87,2990.57) 3427.15,2999.06 ; LED26.5@3416.56,3009.74 ccw(c3424.87,3012.58) 3427.15,3004.09 ; LED14.5@3416.56,3293.41 cw(c3424.87,3290.57) 3427.15,3299.06 ; LED14.5@3416.56,3309.74 ccw(c3424.87,3312.58) 3427.15,3304.09 ; LED2.5@3416.56,3593.41 cw(c3424.87,3590.57) 3427.15,3599.06 ; LED2.5@3416.56,3609.74 ccw(c3424.87,3612.58) 3427.15,3604.09 ; LED134.4@3447.63,289.2 ccw(c3417.75,259.33) 3417.75,301.57 ccw(c3417.75,343.82) LED134.4@3447.63,313.95 ; LED122.4@3447.63,589.2 ccw(c3417.75,559.33) 3417.75,601.57 ccw(c3417.75,643.82) LED122.4@3447.63,613.95 ; LED110.4@3447.63,889.2 ccw(c3417.75,859.33) 3417.75,901.57 ccw(c3417.75,943.82) LED110.4@3447.63,913.95 ; LED98.4@3447.63,1189.2 ccw(c3417.75,1159.33) 3417.75,1201.57 ccw(c3417.75,1243.82) LED98.4@3447.63,1213.95 ; LED86.4@3447.63,1489.2 ccw(c3417.75,1459.33) 3417.75,1501.57 ccw(c3417.75,1543.82) LED86.4@3447.63,1513.95 ; LED74.4@3447.63,1789.2 ccw(c3417.75,1759.33) 3417.75,1801.57 ccw(c3417.75,1843.82) LED74.4@3447.63,1813.95 ; LED62.4@3447.63,2089.2 ccw(c3417.75,2059.33) 3417.75,2101.57 ccw(c3417.75,2143.82) LED62.4@3447.63,2113.95 ; LED50.4@3447.63,2389.2 ccw(c3417.75,2359.33) 3417.75,2401.57 ccw(c3417.75,2443.82) LED50.4@3447.63,2413.95 ; LED38.4@3447.63,2689.2 ccw(c3417.75,2659.33) 3417.75,2701.57 ccw(c3417.75,2743.82) LED38.4@3447.63,2713.95 ; LED26.4@3447.63,2989.2 ccw(c3417.75,2959.33) 3417.75,3001.57 ccw(c3417.75,3043.82) LED26.4@3447.63,3013.95 ; LED14.4@3447.63,3289.2 ccw(c3417.75,3259.33) 3417.75,3301.57 ccw(c3417.75,3343.82) LED14.4@3447.63,3313.95 ; LED2.4@3447.63,3589.2 ccw(c3417.75,3559.33) 3417.75,3601.57 ccw(c3417.75,3643.82) LED2.4@3447.63,3613.95 ; LED134.4@3460,321.57 ccw(c3460,369.86) 3494.14,335.72 ; LED122.4@3460,621.57 ccw(c3460,669.86) 3494.14,635.72 ; LED110.4@3460,921.57 ccw(c3460,969.86) 3494.14,935.72 ; LED98.4@3460,1221.57 ccw(c3460,1269.86) 3494.14,1235.72 ; LED86.4@3460,1521.57 ccw(c3460,1569.86) 3494.14,1535.72 ; LED74.4@3460,1821.57 ccw(c3460,1869.86) 3494.14,1835.72 ; LED62.4@3460,2121.57 ccw(c3460,2169.86) 3494.14,2135.72 ; LED38.4@3460,2721.57 ccw(c3460,2769.86) 3494.14,2735.72 ; LED26.4@3460,3021.57 ccw(c3460,3069.86) 3494.14,3035.72 ; LED14.4@3460,3321.57 ccw(c3460,3369.86) 3494.14,3335.72 ; LED2.4@3460,3621.57 ccw(c3460,3669.86) 3494.14,3635.72 ; LED50.4@3472.37,2389.2 cw(c3502.25,2359.33) 3502.25,2401.57 cw(c3502.25,2443.82) LED50.4@3472.37,2413.95 ; LED134.4@3477.5,304.07 cw(c3513.71,304.07) 3488.11,329.68 ; LED122.4@3477.5,604.07 cw(c3513.71,604.07) 3488.11,629.68 ; LED110.4@3477.5,904.07 cw(c3513.71,904.07) 3488.11,929.68 ; LED98.4@3477.5,1204.07 cw(c3513.71,1204.07) 3488.11,1229.68 ; LED86.4@3477.5,1504.07 cw(c3513.71,1504.07) 3488.11,1529.68 ; LED74.4@3477.5,1804.07 cw(c3513.71,1804.07) 3488.11,1829.68 ; LED62.4@3477.5,2104.07 cw(c3513.71,2104.07) 3488.11,2129.68 ; LED38.4@3477.5,2704.07 cw(c3513.71,2704.07) 3488.11,2729.68 ; LED26.4@3477.5,3004.07 cw(c3513.71,3004.07) 3488.11,3029.68 ; LED14.4@3477.5,3304.07 cw(c3513.71,3304.07) 3488.11,3329.68 ; LED2.4@3477.5,3604.07 cw(c3513.71,3604.07) 3488.11,3629.68 ; 3723.79,357.5 ccw(c3723.79,396.21) v1@3751.16,368.84 ; 3723.79,657.5 ccw(c3723.79,696.21) v1@3751.16,668.84 ; 3723.79,957.5 ccw(c3723.79,996.21) v1@3751.16,968.84 ; 3723.79,1257.5 ccw(c3723.79,1296.21) v1@3751.16,1268.84 ; 3723.79,1557.5 ccw(c3723.79,1596.21) v1@3751.16,1568.84 ; 3723.79,1857.5 ccw(c3723.79,1896.21) v1@3751.16,1868.84 ; 3723.79,2157.5 ccw(c3723.79,2196.21) v1@3751.16,2168.84 ; 3723.79,2457.5 ccw(c3723.79,2496.21) v1@3751.16,2468.84 ; 3723.79,2757.5 ccw(c3723.79,2796.21) v1@3751.16,2768.84 ; 3723.79,3057.5 ccw(c3723.79,3096.21) v1@3751.16,3068.84 ; 3723.79,3357.5 ccw(c3723.79,3396.21) v1@3751.16,3368.84 ; 3723.79,3657.5 ccw(c3723.79,3696.21) v1@3751.16,3668.84 ; 3735.86,357.5 cw(c3735.86,335.86) v1@3751.16,351.16 ; 3735.86,657.5 cw(c3735.86,635.86) v1@3751.16,651.16 ; 3735.86,957.5 cw(c3735.86,935.86) v1@3751.16,951.16 ; 3735.86,1257.5 cw(c3735.86,1235.86) v1@3751.16,1251.16 ; 3735.86,1557.5 cw(c3735.86,1535.86) v1@3751.16,1551.16 ; 3735.86,1857.5 cw(c3735.86,1835.86) v1@3751.16,1851.16 ; 3735.86,2157.5 cw(c3735.86,2135.86) v1@3751.16,2151.16 ; 3735.86,2457.5 cw(c3735.86,2435.86) v1@3751.16,2451.16 ; 3735.86,2757.5 cw(c3735.86,2735.86) v1@3751.16,2751.16 ; 3735.86,3057.5 cw(c3735.86,3035.86) v1@3751.16,3051.16 ; 3735.86,3357.5 cw(c3735.86,3335.86) v1@3751.16,3351.16 ; 3735.86,3657.5 cw(c3735.86,3635.86) v1@3751.16,3651.16